# Altium PCB cy2018brush-driver.PcbDoc
Units mil, origin at the board's own origin, x right, y up, seen from the top; angles counter-clockwise.
Board outline 1651.83 x 1656.72 mil, 2 copper layers (Top Layer, Bottom Layer); 93 components, 101 nets, 336 pads, 49 vias.
Unrouted connection lines stored in the file: 25.
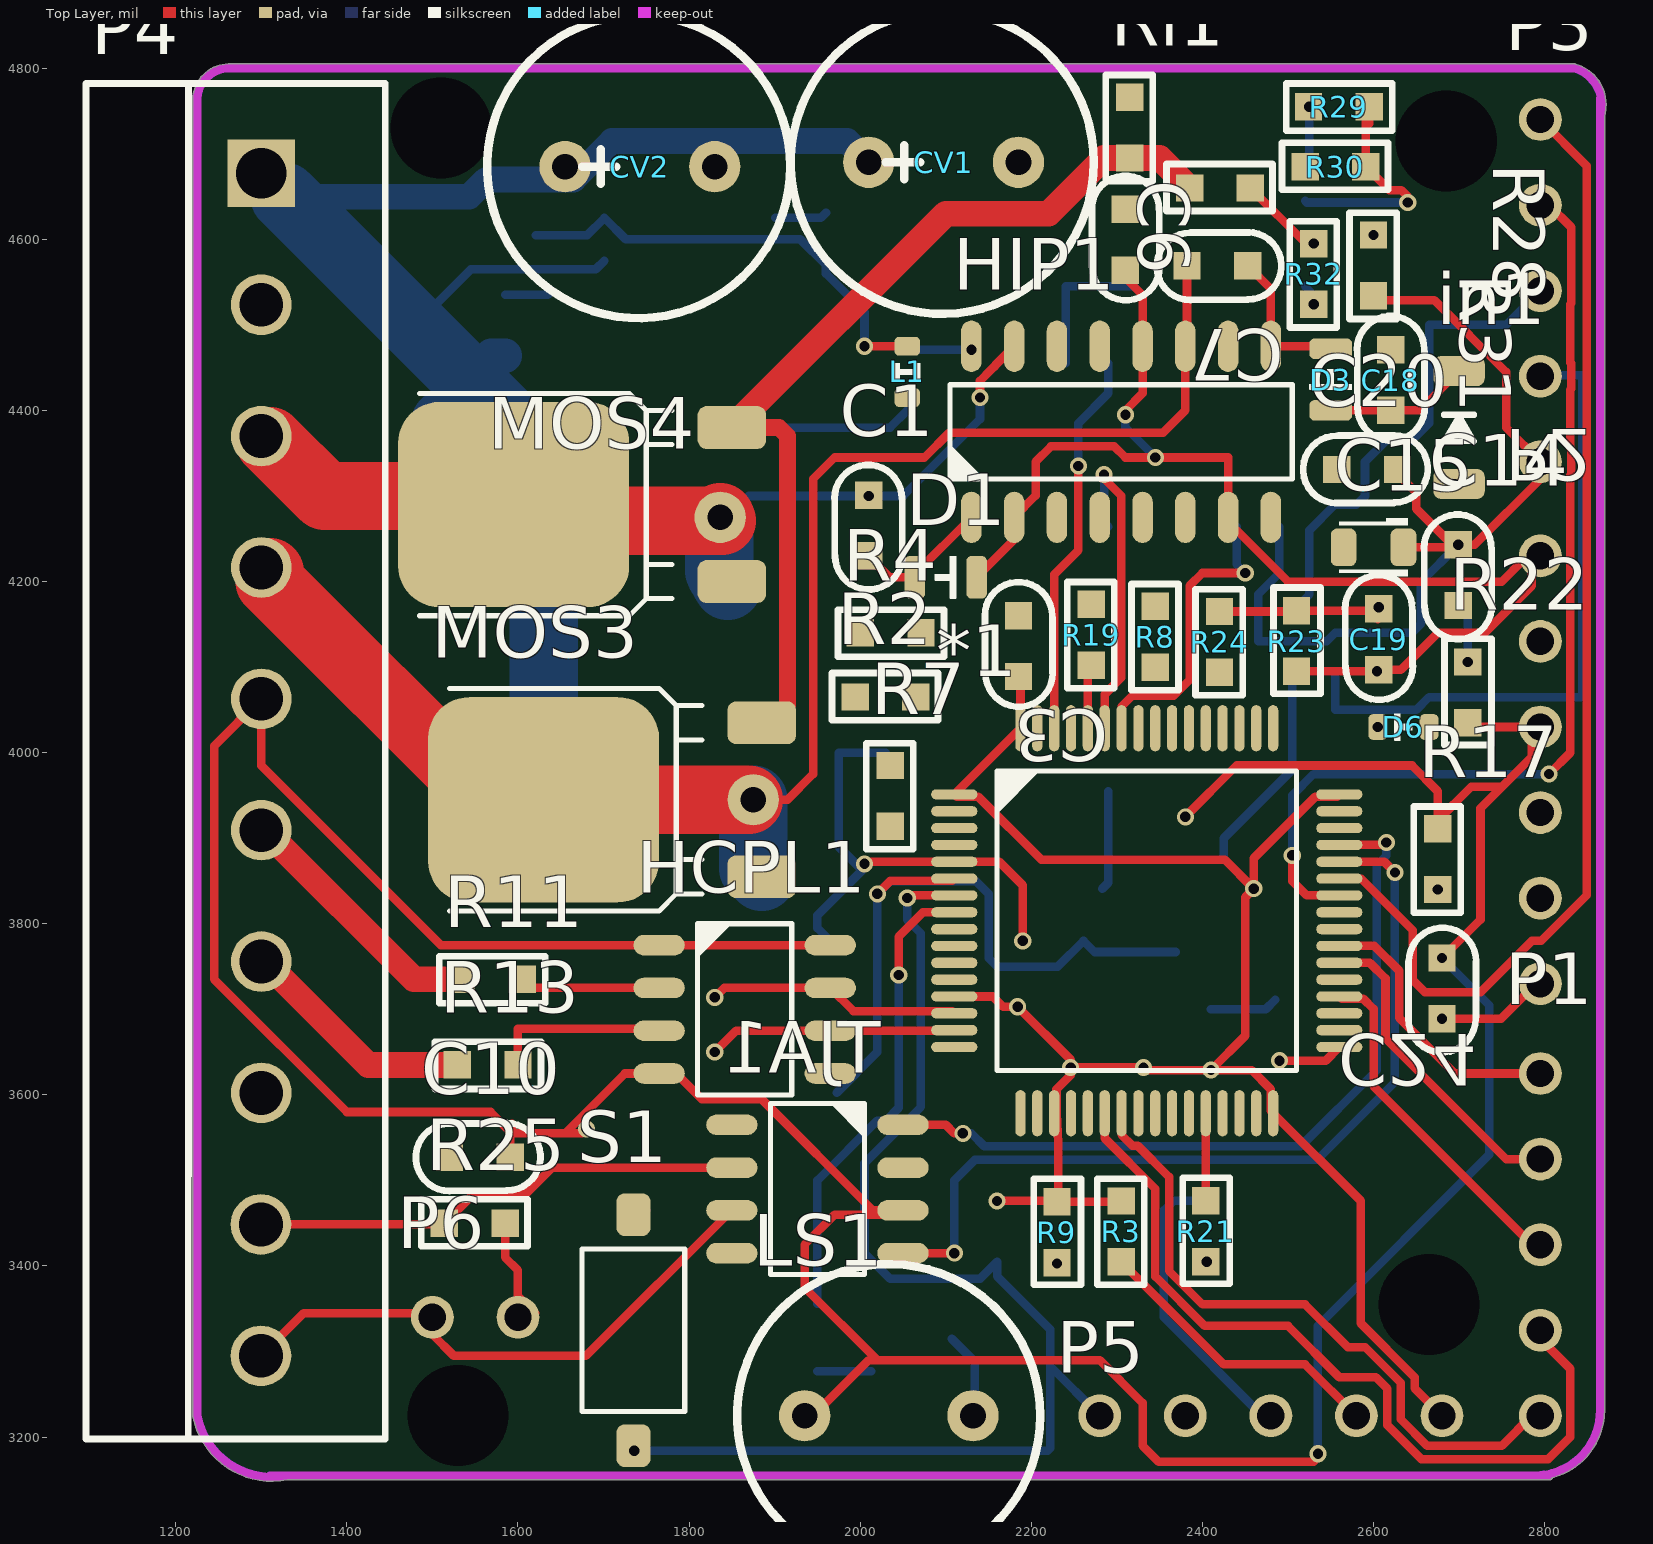
[diagram p0: Top Layer view]
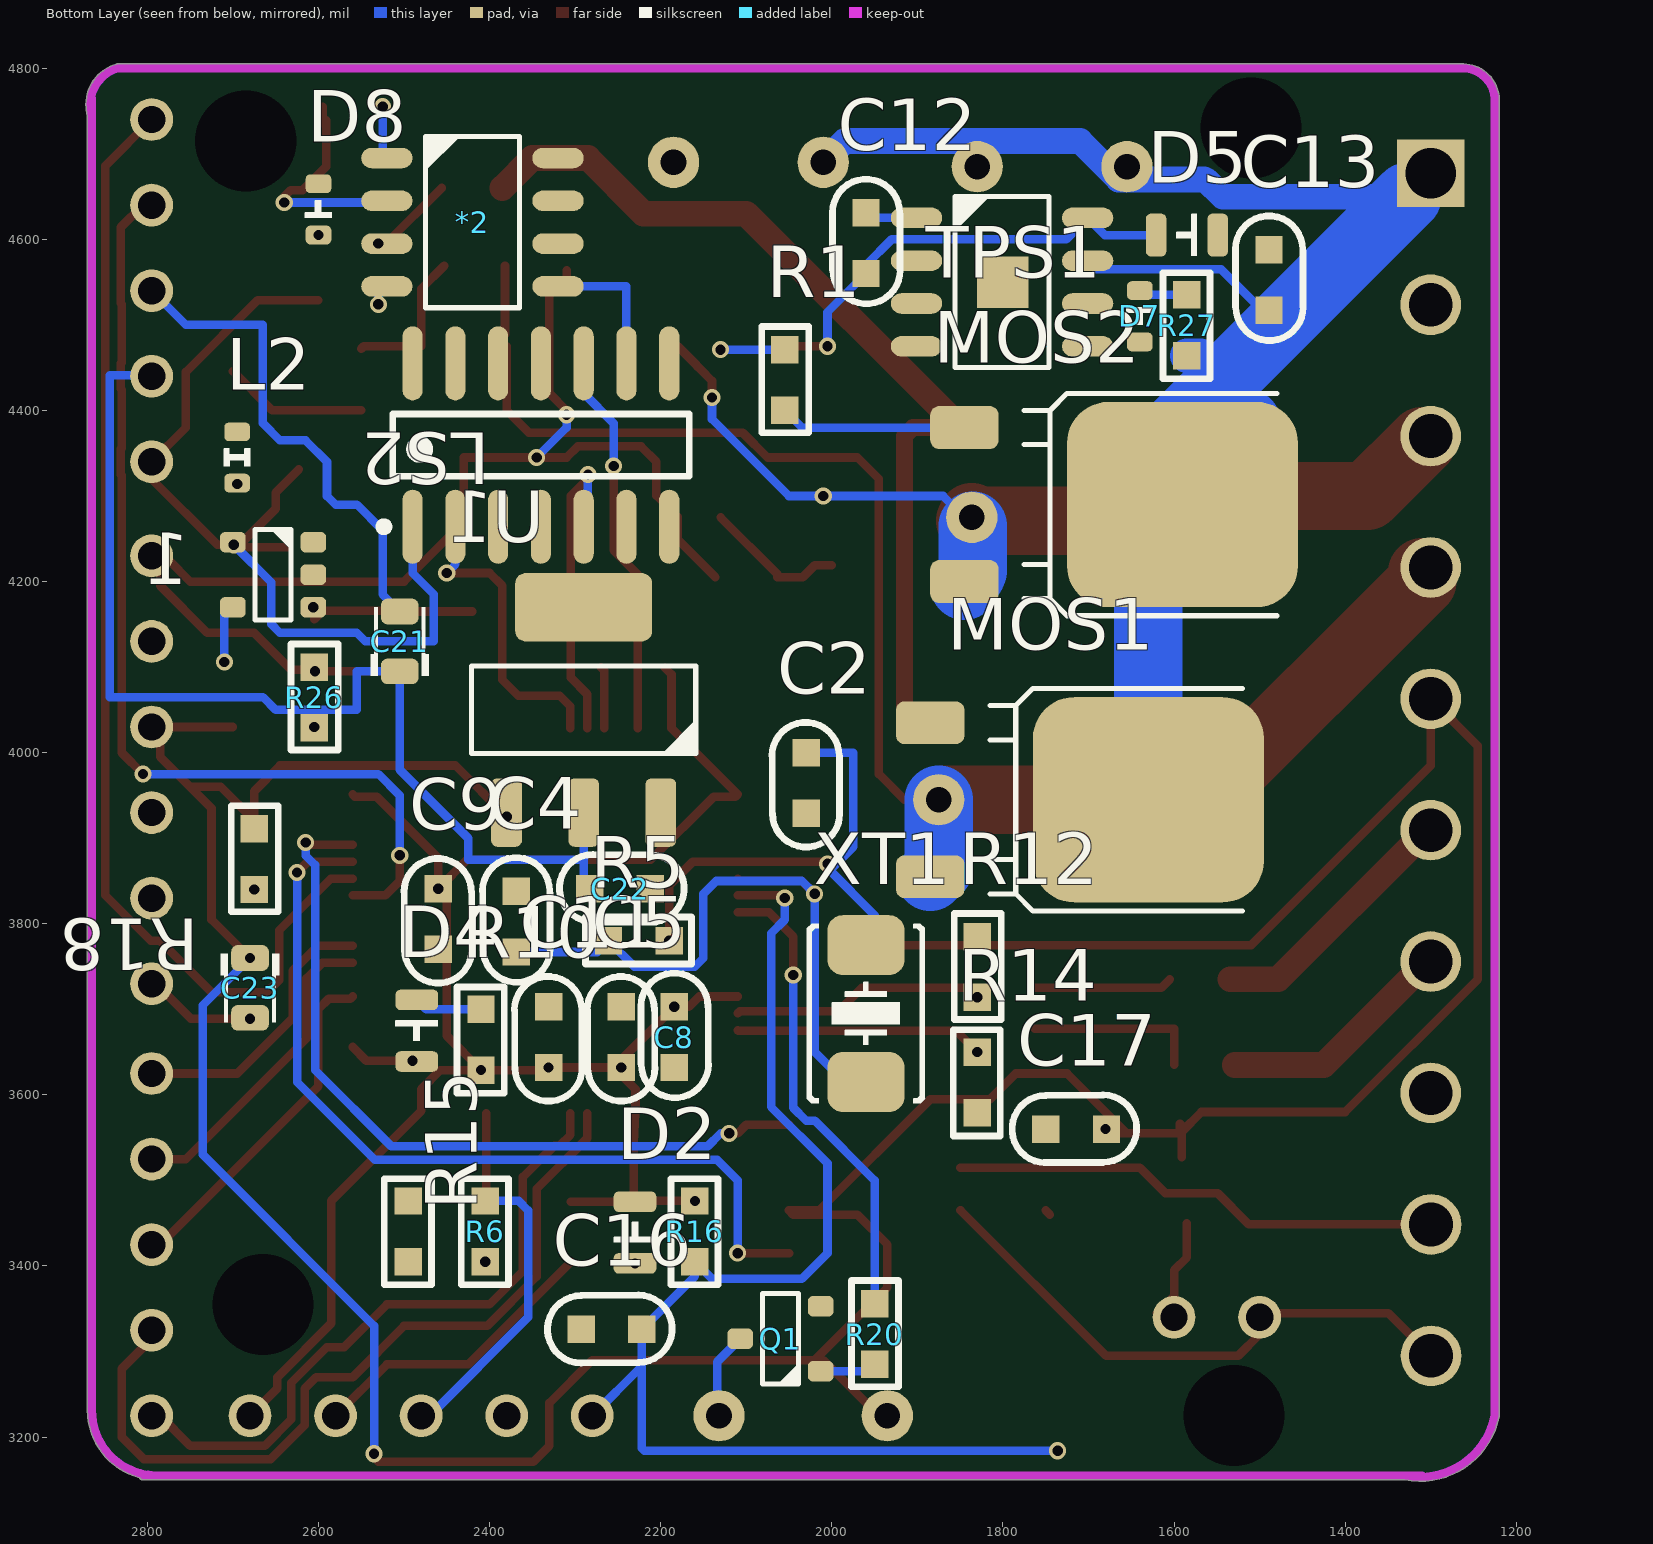
[diagram p1: Bottom Layer view, seen from below]
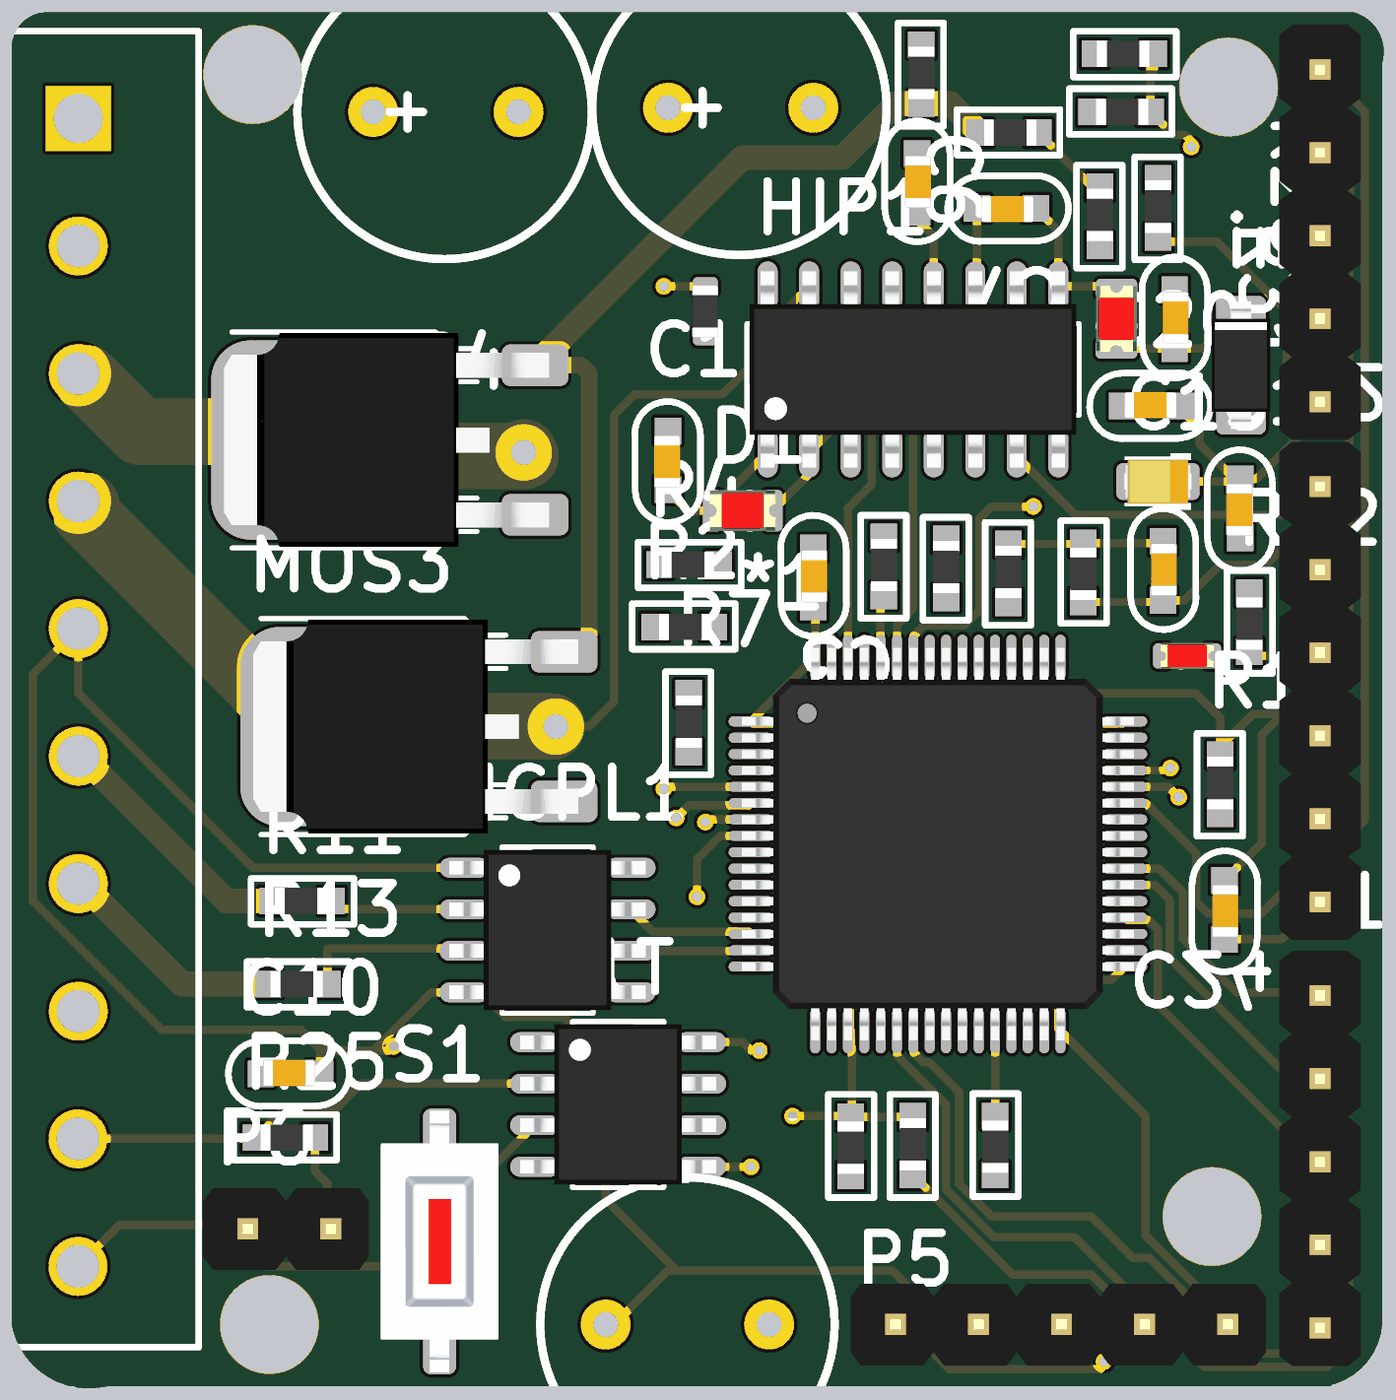
[diagram p2: 3D render of the assembled board from above, using the file's embedded part models]
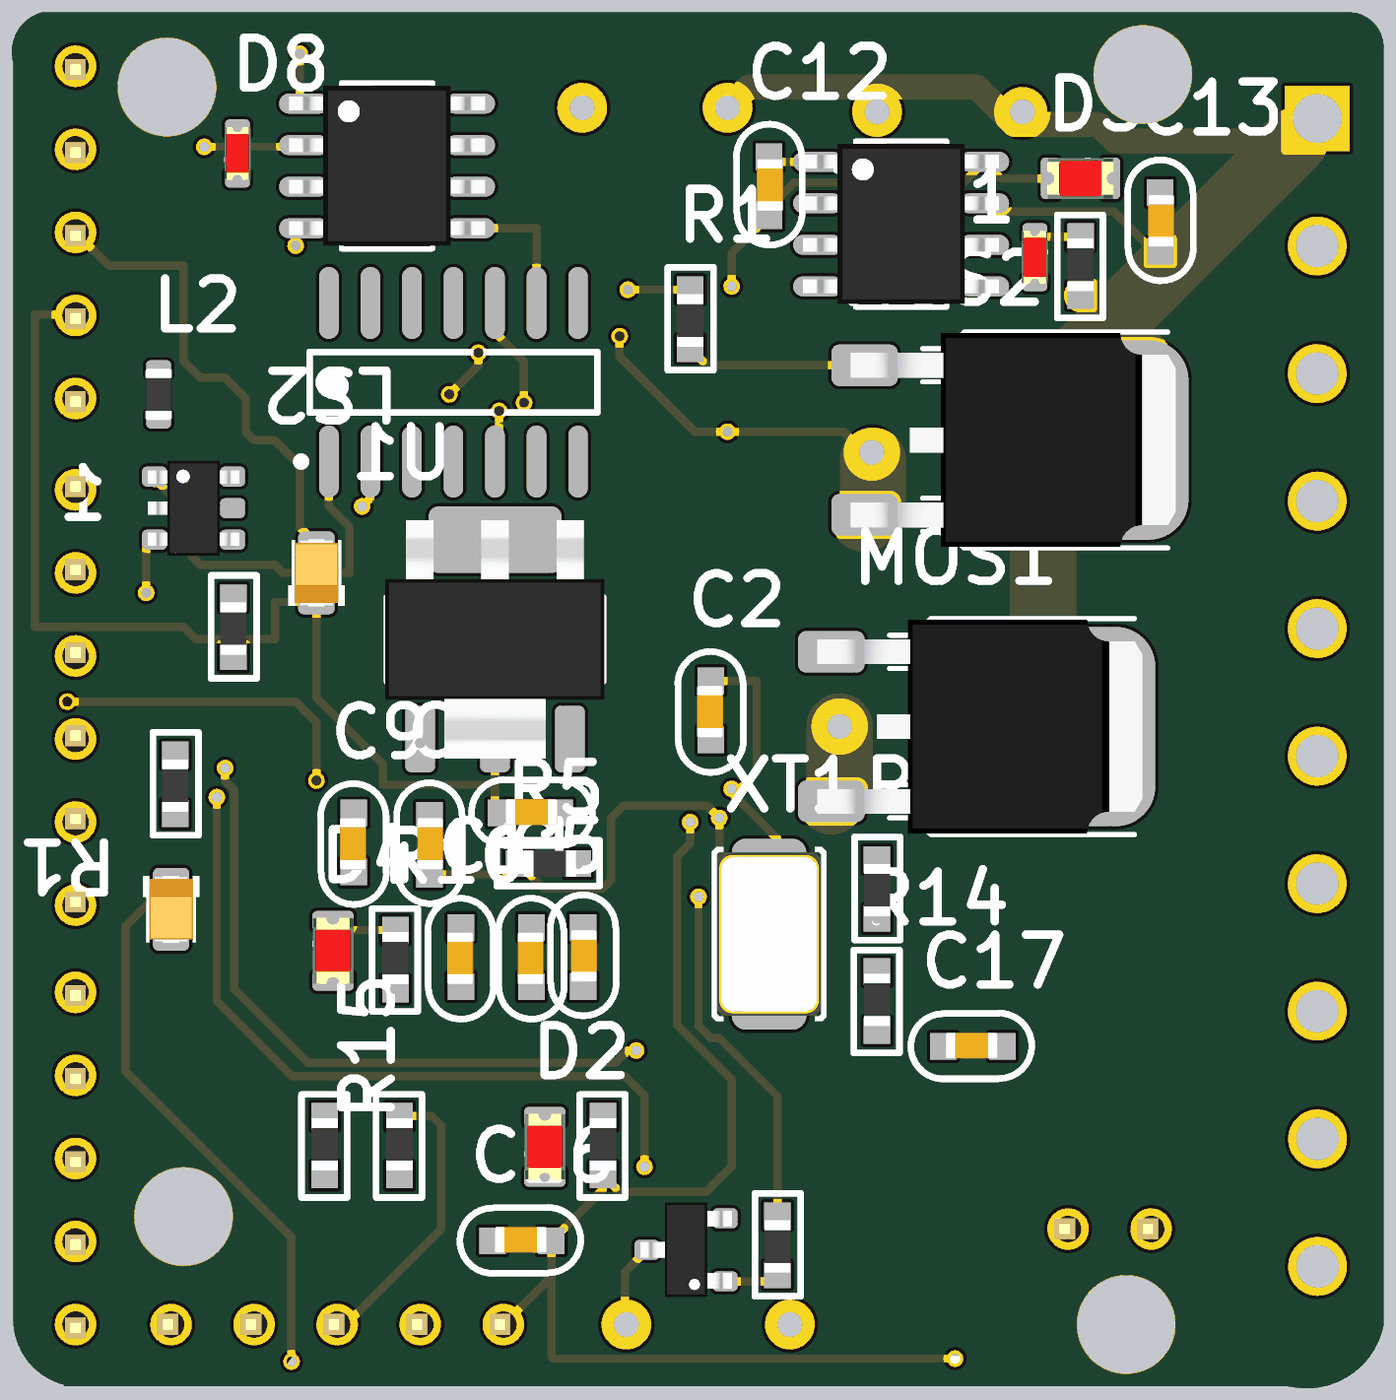
[diagram p3: 3D render of the assembled board from below, using the file's embedded part models]

## Layer stack, top to bottom
Top Solder: solder mask 0.4, Solder Resist, Dk 3.5
Top Layer: signal copper 1.4
Dielectric 1: dielectric 12.6, FR-4, Dk 4.8
Bottom Layer: signal copper 1.4
Bottom Solder: solder mask 0.4, Solder Resist, Dk 3.5

## Board outline
1330.49,3149.99 cw(c1312.5,3242.5) 1220.08,3224.02 cw(c1225,3225) 1219.98,3225 1219.98,4759.84 cw(c1262.5,4762.5) 1265.16,4805.02 2835,4805.02 cw(c2835,4800) 2836.42,4804.81 cw(c2822.5,4757.5) 2871.82,4757.5 cw(c2822.5,4757.5) 2870.01,4744.3 2870.01,3232.54 ccw(c2788.75,3231.25) 2870.01,3232.58 2870.01,3232.54 cw(c2788.75,3231.25) 2870.03,3231.25 cw(c2788.75,3231.25) 2809.43,3152.65 cw(c2805,3155) 2805,3149.99

## Design rules (kind name [scope] priority, off if disabled: settings)
Clearance [All] p1: gap=6 ignorepadtopadclearanceinfootprint=TRUE
PolygonConnect [All] p1: connectstyle=Direct reliefconductorwidth=10 reliefentries=4 polygonreliefangle="90 Angle" airgapwidth=10
RoutingVias [All] p1: holewidth=28 width=50 viastyle="Through Hole" minholewidth=28 minwidth=50 maxholewidth=28 maxwidth=50
SilkToSilkClearance [All] p1 off: silktosilkclearance=10
SolderMaskExpansion [All] p1: expansion=4
Width [All] p1: maxlimit=100 minlimit=10 preferedwidth=10 minimp=50.000000 maximp=50.000000 favimp=50.000000
29 further rules are at their usual default settings.

## Classes and differential pairs
component class Sheet1: 1 *1 C1 C2 C3 C4 C5 C6 C7 C8 C9 C10 C11 C12 C13 C14 C15 C16 C17 C18 C19 C20 C21 C22 C23 C24 CV1 CV2 D1 D2 D3 D4 D5 D6 D7 D8 HCPL1 HIP1 in1 L1 L2 LS1 LS2 MOS1 MOS2 MOS3 MOS4 P1 P2 P3 P4 P5 P6 Q1 R1 R2 R3 R4 R5 R6 R7 R8 R9 R10 R11 R12 R13 R14 R15 R16 R17 R18 R19 R20 R22 R23 R24 R25 R26 R27 R28 Ri1 S1 TJA1 TPS1 U1 XT1
component class 放大电路: *2 R29 R30 R31 R32

## Components (designator, comment, footprint, x,y, rotation, side; value= is the part's Value field where it differs from the comment)
1 "LM27313" SOT23-5 2653,4208 r0 bottom
*1 "STM32F103RC" LQFP_P0.5_64 2335,3803.58 r0 top
*2 "LM358ad" SOP_E150_8#1 2420,4620 r180 bottom
C1 "Cap_0603" CAP_0603#1 2011,4263 r90 top value=1uF
C2 "Cap_0603" CAP_0603#1 2029,3962 r90 bottom value=20pF
C3 "Cap_0603" CAP_0603#1 2184,4127 r270 top value=0.1uF
C4 "Cap_0603" CAP_0603#1 2370,3805 r270 bottom value=20pF
C5 "Cap_0603" CAP_0603#1 2245,3665 r90 bottom value=0.1uF
C6 "Cap_0603" CAP_0603#1 2309,4602 r270 top value=0.1uF
C7 "Cap_0603" CAP_0603#1 2420,4570 r180 top value=1uF
C8 "Cap_0603" CAP_0603#1 2185,3670 r270 bottom value=0.1uF
C9 "Cap_0603" CAP_0603#1 2459,3803 r90 bottom value=0.1uF
C10 "Cap_0603" CAP_0603#1 1553,3526 r0 top value=0.1uF
C11 "Cap_0603" CAP_0603#1 2330,3665 r90 bottom value=0.1uF
C12 "Cap_0603" CAP_0603#1 1961,4598 r270 bottom value=0.1uF
C13 "Cap_0603" CAP_0603#1 1490,4555 r270 bottom value=10uF
C14 "Cap_0603" CAP_0603#1 2700,4205 r90 top value=0.1uF
C15 "Cap_Tan_0805" CAP_TAN_P0805 2600,4240 r180 top value=220uF
C16 "Cap_0603" CAP_0603#1 2260,3325 r180 bottom value=01uF
C17 "Cap_0603" CAP_0603#1 1717,3559 r180 bottom value=0.1uF
C18 "Cap_0603" CAP_0603#1 2619,4438 r270 top value=4.7uF
C19 "Cap_0603" CAP_0603#1 2605,4135 r270 top value=220pF
C20 "Cap_0603" CAP_0603#1 2590,4330 r0 top value=2.2uF
C21 "Cap_Tan_0805" CAP_TAN_P0805 2505,4130 r90 bottom value=100uF
C22 "Cap_0603" CAP_0603#2 2245,3840 r0 bottom value=0.1uF
C23 "Cap_Tan_0805" CAP_TAN_P0805 2680,3725 r270 bottom value=100uF
C24 "Cap_0603" CAP_0603#2 2679,3722 r90 top value=0.1uF
CV1 "680uF" 电解电容器 2185,4690 r180 top value=*μF
CV2 "680uF" 电解电容器 1830,4685 r180 top value=*μF
D1 "Din5819" LED_0805_RED 2100,4205 r180 top
D2 "LED_0805" LED_0805_RED 2230,3439 r90 bottom
D3 "Din5819" LED_0805_RED 2550,4436 r90 top
D4 "LED_0805" LED_0805_RED 2485,3675 r270 bottom
D5 "Diode" LED_0805_RED 1585,4605 r0 bottom
D6 "LED_0603" LED_0603_RED 2635,4030 r0 top
D7 "LED_0603" LED_0603_RED 1640,4510 r270 bottom
D8 "LED_0603" LED_0603_RED 2600,4635 r90 bottom
HCPL1 "HCPL0630" SOP_E150_8#1 1865,3700 r0 top
HIP1 "hip4082" SOP_E150_16 2305,4375 r90 top
in1 "SchottkyDiode_SOD123" SOD-123 2700,4380 r90 top value=B?
L1 "Ind_0603" IND_0603 2055,4445 r270 top value=47H
L2 "Ind_0603" IND_0603 2695,4345 r270 bottom value=10uH
LS1 "Bell" Bell-5.6-0.6-9mm 2033.43,3225 r0 top
LS2 "74LS08" SOP14 2338,4357.53 r90 bottom
MOS1 "MOSFET_N" TO-252AA 1885,4035 r270 bottom value=NMOS?
MOS2 "MOSFET_N" TO-252AA 1845,4380 r270 bottom value=NMOS?
MOS3 "MOSFET_N" TO-252AA 1885,3855 r90 top value=NMOS?
MOS4 "MOSFET_N" TO-252AA 1850,4200 r90 top value=NMOS?
P1 "HDR1x5_2.54" HDR1X5_2.54_180 2795,3225 r180 top
P2 "HDR1x6_2.54" HDR1X6_2.54_180 2795,4230 r180 top
P3 "HDR1x5_2.54" HDR1X5_2.54_180 2795,4340 r180 top
P4 "Header 10" Green_10P 1300,4670 r270 top
P5 "HDR1x5_2.54" HDR1X5_2.54_180 2680,3225 r270 top
P6 "HDR1x2_2.54" HDR1X2_2.54_180 1600,3340 r270 top
Q1 "BJT_NPN" SOT23-3 2060,3315 r0 bottom
R1 "Res_0603" RES_0603 1973,4434 r270 bottom value=10K
R2 "Res_0603" RES_0603 2031,4147 r0 top value=10K
R3 "Res_0603" RES_0603 2223,3442 r90 top value=10K
R4 "Res_0603" RES_0603 2034,4058 r180 top value=10K
R5 "Res_0603" RES_0603 2224,3862 r180 bottom value=1M
R6 "Res_0603" RES_0603 2487,3442 r90 bottom value=10K
R7 "Res_0603" RES_0603 1953,3951 r90 top value=10K
R8 "Res_0603" RES_0603 2263,4137 r90 top value=10K
R9 "Res_0603" RES_0603 2312,3438 r270 top value=10K
R10 "Res_0603" RES_0603 2492,3666 r90 bottom value=10K
R11 "Res_0603" RES_0603 1568,3653 r180 top value=500
R12 "Res_0603" RES_0603 1748,3748 r270 bottom value=2k
R13 "Res_0603" RES_0603 1563,3553 r180 top value=500
R14 "Res_0603" RES_0603 1912,3616 r90 bottom value=2k
R15 "Res_0603" RES_0603 2577,3442 r90 bottom value=0
R16 "Res_0603" RES_0603 2242,3442 r90 bottom value=10K
R17 "Res_0603" RES_0603 2593,3877 r90 top value=10K
R18 "Res_0603" RES_0603 2593,3874 r270 bottom value=3.3K
R19 "Res_0603" RES_0603 2188,4139.37 r90 top value=10K
R20 "Res_0603" RES_0603 1868,3319 r270 bottom value=1K
R21 "Res_0603" RES_0603 2485.9,3439.1 r270 top value=10K
R22 "Res_0603" RES_0603 2792,4069 r270 top value=10K
R23 "Res_0603" RES_0603 2592,4129 r270 top value=10K
R24 "Res_0603" RES_0603 2338,4131 r90 top value=1K
R25 "Res_0603" RES_0603 1551,3532 r0 top value=120
R26 "Res_0603" RES_0603 2523,4063 r270 bottom value=10K
R27 "Res_0603" RES_0603 1667,4501 r90 bottom value=10K
R28 "Res_0603" RES_0603 2518,4571 r90 top value=10K
R29 "Res_0603" RES_0603 2558,4673 r180 top value=500K
R30 "Res_0603" RES_0603 2557,4767 r0 top value=10K
R31 "Res_0603" RES_0603 2422,4742 r0 top value=10K
R32 "Res_0603" RES_0603 2448,4561 r90 top value=500K
Ri1 "Res_0603" RES_0603 2233,4732 r90 top value=0.001
S1 "ButtonTACT_3x6x2.5_180" ButtonTACT_3x6x2.5_180 1735,3325 r90 top
TJA1 "TJA1050" SOP_E150_8#2 1950,3490 r180 top
TPS1 "TPS5430" SOP_E150_9 1800,4551 r180 bottom
U1 "tlv1117-3.3" SOT223-3 2290,4050 r0 bottom
XT1 "XTAL_32.768kHz" XT_5032_2 1960,3695 r90 bottom value=8M

## Footprints (in the part's own frame and the unit in brackets; to place one, negate y for a bottom-side part, rotate by r counter-clockwise, add the part's x,y. Pads: shape width x height; smd on the part's side, far side on the other; paste and mask are expansions set on the pad)
Bell-5.6-0.6-9mm [mil]
  round 60 hole 30: 1(-98.43,0) 2(98.43,0)
  silkscreen extent -177,-177 177,177
ButtonTACT_3x6x2.5_180 [mil]
  rrect50% 50x40 smd: 1(-135,0) 2(135,0)
  silkscreen extent -95,-60 95,60, body extent -157,-71 157,71, height 94
CAP_0603#1 [mil]
  rect 32x32 smd: 1(-33,1) 2(38,1)
  silkscreen extent -72,-38 73,41, body extent -30,-14 33,18, height 31
CAP_0603#2 [mil]
  rect 32x32 smd: 1(-33,-1) 2(38,-1)
  silkscreen extent -72,-41 73,38, body extent -30,-18 33,14, height 31
CAP_TAN_P0805 [mil]
  rrect50% 30x44 smd: 1(-35,0) 2(35,0)
  silkscreen extent -40,-34 40,34, body extent -40,-27 40,27, height 59
Green_10P [mm]
  rect 2x2 hole 1.5: 1(-0.18,0)
  round 1.8 hole 1.3: 2(3.72,0) 3(7.62,0) 4(11.52,0) 5(15.42,0) 6(19.32,0) 7(23.22,0) 8(27.12,0) 9(31.025,-0.01) 10(34.925,-0.01)
  silkscreen extent -2.85,-5.21 37.39,3.68
HDR1X2_2.54_180 [mil]
  round 50 hole 32: 1(0,0) 2(0,-100)
  body extent -49,-150 49,50, height 323
HDR1X5_2.54_180 [mil]
  round 50 hole 32: 1(0,0) 2(0,-100) 3(0,-200) 4(0,-300) 5(0,-400)
  body extent -49,-450 49,50, height 323
HDR1X6_2.54_180 [mil]
  round 50 hole 32: 1(0,0) 2(0,100) 3(0,200) 4(0,300) 5(0,400) 6(0,500)
  body extent -49,-58 49,542, height 323
IND_0603 [mil]
  rrect50% 22x30 smd: 1(-30,0) 2(30,0)
  silkscreen extent -10,-15 10,15, body extent -31,-16 31,16, height 31
LED_0603_RED [mil]
  rrect50% 22x30 smd: 1(-30,0) 2(30,0)
  silkscreen extent -10,-16 10,16, body extent -32,-16 32,16, height 24
LED_0805_RED [mil]
  rrect50% 24x50 smd: 1(-36,0) 2(36,0)
  silkscreen extent -12,-24 12,24, body extent -40,-25 40,25, height 43
LQFP_P0.5_64 [mil]
  oval 54x12 smd: 1(-225,147.64) 2(-225,127.95) 3(-225,108.27) 4(-225,88.58) 5(-225,68.9) 6(-225,49.21) 7(-225,29.53) 8(-225,9.84) 9(-225,-9.84) 10(-225,-29.53) 11(-225,-49.21) 12(-225,-68.9) 13(-225,-88.58) 14(-225,-108.27) 15(-225,-127.95) 16(-225,-147.64) 33(225,-147.64) 34(225,-127.95) 35(225,-108.27) 36(225,-88.58) 37(225,-68.9) 38(225,-49.21) 39(225,-29.53) 40(225,-9.84) 41(225,9.84) 42(225,29.53) 43(225,49.21) 44(225,68.9) 45(225,88.58) 46(225,108.27) 47(225,127.95) 48(225,147.64)
  oval 12x54 smd: 17(-147.64,-225) 18(-127.95,-225) 19(-108.27,-225) 20(-88.58,-225) 21(-68.9,-225) 22(-49.21,-225) 23(-29.53,-225) 24(-9.84,-225) 25(9.84,-225) 26(29.53,-225) 27(49.21,-225) 28(68.9,-225) 29(88.58,-225) 30(108.27,-225) 31(127.95,-225) 32(147.64,-225) 49(147.64,225) 50(127.95,225) 51(108.27,225) 52(88.58,225) 53(68.9,225) 54(49.21,225) 55(29.53,225) 56(9.84,225) 57(-9.84,225) 58(-29.53,225) 59(-49.21,225) 60(-68.9,225) 61(-88.58,225) 62(-108.27,225) 63(-127.95,225) 64(-147.64,225)
  silkscreen extent -175,-175 175,175, body extent -236,-236 236,236, height 59
RES_0603 [mil]
  rect 32x32 smd: 1(-37,-82) 2(34,-82)
  silkscreen extent -64,-109 60,-54, body extent -31,-98 31,-66, height 18
SOD-123 [mil]
  rrect50% 35x60 smd: 1(-66,0) 2(66,0)
  silkscreen extent -16,-18 16,18, body extent -77,-35 77,35, height 46
SOP14 [mm]
  oval 2.2x0.6 smd: 1(-2.374,3.861) 2(-2.374,2.591) 3(-2.374,1.321) 4(-2.374,0.051) 5(-2.374,-1.219) 6(-2.374,-2.489) 7(-2.374,-3.759) 8(2.476,-3.759) 9(2.476,-2.489) 10(2.476,-1.219) 11(2.476,0.051) 12(2.476,1.321) 13(2.476,2.591) 14(2.476,3.861)
  silkscreen extent -2.5,-4.35 0.98,4.84, body extent -1.95,-4.35 2.05,4.45, height 1.7
SOP_E150_8#1 [mil]
  oval 60x24 smd: 1(-100,75) 2(-100,25) 3(-100,-25) 4(-100,-75) 5(100,-75) 6(100,-25) 7(100,25) 8(100,75)
  silkscreen extent -55,-100 55,100, body extent -118,-96 118,96, height 69
SOP_E150_8#2 [mil]
  oval 60x24 smd: 1(-100,-75) 2(-100,-25) 3(-100,25) 4(-100,75) 5(100,75) 6(100,25) 7(100,-25) 8(100,-75)
  silkscreen extent -55,-100 55,100, body extent -118,-96 118,96, height 69
SOP_E150_9 [mil]
  oval 60x24 smd: 1(-101,74) 2(-101,24) 3(-101,-26) 4(-101,-76) 5(99,-76) 6(99,-26) 7(99,24) 8(99,74)
  rect 60x60 smd: 9(0,-1)
  silkscreen extent -56,-101 54,99, body extent -119,-97 117,95, height 69
SOP_E150_16 [mil]
  oval 60x24 smd: 1(-100,175) 2(-100,125) 3(-100,75) 4(-100,25) 5(-100,-25) 6(-100,-75) 7(-100,-125) 8(-100,-175) 9(100,-175) 10(100,-125) 11(100,-75) 12(100,-25) 13(100,25) 14(100,75) 15(100,125) 16(100,175)
  silkscreen extent -55,-200 55,200, body extent -118,-197 118,197, height 69
SOT23-3 [mil]
  rrect50% 30x24 smd: 1(-47,38) 2(-47,-38) 3(47,0)
  silkscreen extent -21,-53 21,53, body extent -55,-57 55,57, height 51
SOT23-5 [mil]
  rrect50% 30x24 smd: 1(-47,-38) 2(-47,0) 3(-47,38) 4(47,38) 5(47,-38)
  silkscreen extent -21,-53 21,53, body extent -55,-57 55,57, height 57
SOT223-3 [mil]
  rrect40% 36x80 smd: 1(-90.16,120) 2(0,120) 3(90.16,120)
  rrect30% 160x80 smd: 4(0,-120)
  silkscreen extent -131,-51 131,51, body extent -132,-144 132,144, height 71
TO-252AA [mil]
  rrect40% 50x80 smd: 1(0,0) 3(180,0)
  rrect40% 240x270 smd: 4(90,255)
  silkscreen extent -40,70 220,365, body extent -39,-17 219,374, height 91
XT_5032_2 [mil]
  rrect50% 70x90 smd: 1(-80,0) 2(80,0)
  silkscreen extent -104,-68 104,68, body extent -98,-63 98,63, height 39
电解电容器 [mil]
  round 60 hole 30: 1(175,0) 2(0,0)
  silkscreen extent -88,-177 266,177

## Part data
*1: "MCU"
C1 C2 C3 C4 C5 C6 C7 C8 C9 C10 C11 C12 C13 C14 C15 C16 C17 C18 C19 C20 C21 C22 C23 C24: "Capacitor"
CV1 CV2: library part CAP-ELE, "电解电容", LatestRevisionDate=17-Jul-2002, LatestRevisionNote="Re-released for DXP Platform.", PackageDescription="Polarized Capacitor (Radial); 2 Leads", PackageReference=RB7.6-15, Published=8-Jun-2000, Publisher="Altium Limited"
D1 D3: library part Diode, "Diode"
D2 D4 D6 D7 D8: "LED"
in1: "Diode"
L1 L2: "Inductor"
LS1: "Electrical Bell", LatestRevisionDate=17-Jul-2002, LatestRevisionNote="Re-released for DXP Platform.", PackageReference=PIN2, Published=24-Mar-1999, Publisher="Altium Limited"
MOS1 MOS2 MOS3 MOS4: "MOSFET"
P1 P2 P3 P5 P6: "Header"
P4: "Header, 10-Pin", LatestRevisionDate=17-Jul-2002, LatestRevisionNote="Re-released for DXP Platform.", Publisher="Altium Limited"
Q1: "Transistor"
R1 R2 R3 R4 R5 R6 R7 R8 R9 R10 R11 R12 R13 R14 R15 R16 R17 R18 R19 R20 R21 R22 R23 R24 R25 R26 R27 R28 R29 R30 R31 R32 Ri1: "Resistor"
S1: "Button"
TJA1: "CAN总线收发器"
U1: library part LM1117IMP-5.0, "800mA Low-Dropout Linear Regulator", DigiKeyPartNumber=LM1117IMP-5.0CT-ND, Manufacturer="National Semiconductor", PackageTopMarking=XYTT*N06B, PowerWise=N, Code_IPC=SOT223-4, Code_JEDEC=TO-261-AA, ComponentLink1Description="LM1117 Datasheet", ComponentLink1URL=http://www.national.com/ds/LM/LM1117.pdf, ComponentLink2Description="LM1117 Web Page", ComponentLink2URL=http://www.national.com/pf/LM/LM1117.html, ComponentLink3Description="MP04A Package Page", ComponentLink3URL=http://www.national.com/packaging/folders/mp04a.html, CompType="LDO IC", DatasheetVersion=Apr-2006, PackageDescription="Molded SOT-223, 6.50 x 3.56 x 1.6mm Body, 4 Lead, 2.3mm Pitch", PackageReference=MP04A, PackageVersion="revB, Apr-2003", PartNumber=LM1117IMP-5.0, PinCount=4, Published=4-Dec-2008, Publisher="Altium Limited", RoHS=O
XT1: library part XTAL_32.768k, "Crystal Oscillator"

## Free pads (board coordinates)
  round 30 hole 118.11: 1(1530,3225) 2(2665,3355) 3(2685,4715) 4(1510,4730)
  round 60 hole 30: 6(1875,3945) 7(1836.25,4275)

## Via types
v1: diameter 20, hole 12, Top Layer to Bottom Layer, 49 vias

## Nets (pads, with @x,y where several pads share a name; then routed paths per layer and width w, separated by ;. In a path a pad name is that pad's centre, name@x,y a point inside that pad or via, vN(x,y) a via of type N, cw(c..) or ccw(c..) an arc to the next point about the centre after c; other vN are vias at no path point)
3.3V: C21.1 C22.2 P3.2 R12.1 R14.1 U1.2 | length 1320.7
  Bottom Layer w10: C22.2 2290,3848 2290,3875 ; U1.2@2290,3955 U1.2 2290,3875 ; P3.2 2796,4441 2844,4441 2844,4065 2665,4065 2650,4050 2555,4050 2555,4095 C21.1 2505,3980 2425,3900 2425,3875 2290,3875
3V3: *1.1 *1.13 *1.19 *1.32 *1.48 *1.64 C3.2 C5.1 C8.1 C9.2 C11.1 P5.1 R3.2 R9.1 R10.1 R16.2 | length 2192.1
  Top Layer w10: *1.13 2155,3715 2167,3703 v1(2184,3703) 2246,3641 v1(2246,3632) ; v1(2160,3476) R9.1@2231.73,3476 ; C3.2@2195,4099 2187.36,4091.36 *1.64 *1.1 2112.68,3948.54 2138.04,3948.54 2211.58,3875 2426,3875 v1(2460,3841) ; R9.1@2220,3475 R9.1 R9.1@2231.73,3475 ; R9.1@2231.73,3471.73 R9.1@2231.73,3475 ; R3.2@2305,3475 R9.1@2235,3475 ; *1.48 2557.31,3948.54 2531.96,3948.54 2460,3876.58 v1(2460,3841) ; P5.1 2648,3257 2648,3270 2585,3333 2585,3476.22 *1.32 2479.95,3581.27 2479.95,3606.62 2457.58,3629 v1(2410,3629) ; R9.1@2231.73,3475 R9.1@2231.73,3476 ; R9.1@2231.73,3475 R9.1@2235,3475 ; R9.1@2231.73,3476 2231.73,3543.58 2229.57,3578.76 2229.42,3581.27 2229.42,3606.62 2246,3623.21 v1(2246,3632) ; R9.1@2231.73,3476 2236,3476 R9.1@2235,3475 ; v1(2246,3632) v1(2331,3632) 2334,3629 v1(2410,3629) ; v1(2410,3629) 2450,3669 2450,3831 v1(2460,3841)
5V: 1.5 *2.5 C10.2 C14.2 C15.1 C17.2 C20.2 C23.1 C24.2 HCPL1.1 HCPL1.4 HCPL1.8 L1.2 L2.1 LS1.1 LS2.1 LS2.4 LS2.9 LS2.14 P2.3 P3.1 P4.5 R17.2 R22.2 R28.1 TJA1.3 U1.3 | length 6054
  Top Layer w10: C10.2 1591,3557 ; v1(1680,3560) 1675,3555 1655,3555 ; LS1.1 1945,3225 2010,3290 2280,3290 2330,3240 2330,3190 2349,3171 2530,3171 2535,3176 v1(2535,3180.5) ; HCPL1.8 HCPL1.1 1510,3775 1300,3985 P4.5 1245,4007.91 1245,3735 1400,3580 1568,3580 1591,3557 ; 2020,3290 1935,3375 1935,3425 1970,3460 2045,3460 TJA1.3 2015,3465 1885,3595 1815,3595 1785,3625 HCPL1.4 1725,3625 1655,3555 ; v1(2380,3925) 2440,3985 2645,3985 2675,3955 2675,3921 2714,3960 2749,3960 ; R28.1@2600,4529 2671,4529 2755,4445 2755,4380 P3.1 2795,4320 2718,4243 v1(2699,4243) 2692,4243 2650,4285 2650,4304 C20.2@2623,4331 ; C15.1 C14.2@2695,4240 ; v1(2680,3760) 2725,3805 2725,3935 2785,3995 2785,4030 R22.2@2700,4030 ; 1591,3557 1593,3555 ; 1591,3557 1591,3564 1593,3566 1593,3555 ; 1593,3555 1655,3555
  Bottom Layer w10: LS2.9 2240,4545 *2.5 ; LS2.1 2490,4210 2465,4185 2465,4130 2545,4130 2555,4140 2645,4140 2655,4150 2655,4199 v1(2699,4243) ; v1(2535,3180.5) 2535,3330 2735,3530 2735,3705 v1(2680,3760)
12V: C6.2 C18.2 C19.2 D1.1 D3.1 HIP1.2 HIP1.7 HIP1.12 in1.2 P2.1 R23.2 R26.1 | length 1636.3
  Top Layer w10: D1.1 2180,4249 HIP1.2 2180,4275.53 2205,4300.53 2205,4340 2223,4358 2297,4358 2310,4345 2430,4345 HIP1.7 2430,4270 2500,4200 2750,4200 2775,4225 2785,4225 2785,4195 2730,4140 2675,4140 2632,4097 C19.2 v1(2604,4095) R23.2 ; v1(2310,4395) 2310,4400 2330,4420 HIP1.12 2330,4535 2310,4555 C6.2 ; D3.1 C18.2 2654,4400 in1.2
  Bottom Layer w10: v1(2310,4395) 2310,4380 v1(2345,4345)
BOOT0: *1.60 R19.1 | length 73
  Top Layer w10: *1.60 2266.1,4096.1 R19.1@2270,4100
BOOT1: *1.28 R21.1 | length 104
  Top Layer w10: *1.28 R21.1 R21.1@2405,3475
CAN_H: P4.9 R25.1 TJA1.7 | length 577.9
  Top Layer w10: P4.9 1512.56,3448.56 R25.1 1549,3485 1610,3485 1640,3515 TJA1.7
CAN_L: P4.10 P6.2 TJA1.6 | length 676.9
  Top Layer w10: P4.10 1349.57,3345 1500,3345 P6.2 1500,3320 1524.94,3295.05 1559.02,3295.05 1559.07,3295 1679.47,3295 1849.47,3465 TJA1.6
CAN_RX: *1.44 TJA1.4 | length 1022.8
  Top Layer w10: TJA1.4 v1(2110,3415) ; *1.44 2612.52,3872.48 v1(2625,3860)
  Bottom Layer w10: v1(2110,3415) 2110,3500 2134,3524 2534,3524 2625,3615 v1(2625,3860)
CAN_TX: *1.45 TJA1.1 | length 928
  Top Layer w10: TJA1.1 2100,3565 2110,3555 v1(2120,3555) ; *1.45 2612.17,3892.17 v1(2615,3895)
  Bottom Layer w10: v1(2120,3555) 2130,3555 2145,3540 2515,3540 2604,3629 2604,3868.7 2615,3879.7 v1(2615,3895)
DIS: *1.62 LS2.10 | length 452.6
  Top Layer w10: *1.62 2226.73,4208.27 2255,4236.54 v1(2255,4335)
  Bottom Layer w10: v1(2255,4335) 2255,4385 2290,4420 LS2.10
DIS2: *1.36 P1.3 | length 398.1
  Top Layer w10: *1.36 2562.68,3712.31 2588.04,3712.31 2600,3700.36 2600,3610 P1.3@2785,3425
DISIN: HIP1.8 LS2.8
GND: *1.12 *1.18 *1.31 *1.47 *1.63 C2.1 C3.1 C4.1 C5.2 C8.2 C9.1 C11.2 C16.1 C17.1 C21.2 C22.1 D2.2 HCPL1.5 P3.3 P5.4 R6.1 R15.2 R19.2 R21.2 S1.2 TJA1.2 TJA1.8 U1.1 | length 587.1
  Top Layer w10: S1.2@1745,3460 S1.2@1750,3465
  Bottom Layer w10: C21.2 2525,4185 2525,4260 2555,4290 2580,4290 2590,4300 2590,4340 2615,4365 2645,4365 2665,4385 2665,4500 2755,4500 P3.3
  other v1: 2405,3405
LED1: *1.30
LED2: *1.29
MOT+: C1.2 HIP1.15 MOS2.3 MOS4.4 P4.3 pad.7 | length 1102.7
  Top Layer w10: v1(2140,4415) 2140,4434.47 2153,4447.47 2157.76,4452.24 2157.76,4452.76 HIP1.15
  Top Layer w80: P4.3@1310,4364.17 1374.17,4300 1620,4300 1649,4271 1838.5,4271 pad.7
  Bottom Layer w10: pad.7@1835,4265 1870,4300 v1(2010,4300) 2050,4300 2140,4390 v1(2140,4415)
  Bottom Layer w80: pad.7@1835,4265 1835,4212.62 1842.85,4198.78 MOS2.3@1845,4195
MOT-: C7.2 HIP1.11 MOS1.3 MOS3.4 P4.4 pad.6 | length 1826
  Top Layer w10: pad.6 1915,3945 1945,3975 1945,4320 1970,4345 2075,4345 2104,4374 2354,4374 2380,4400 HIP1.11 HIP1.11@2385,4475 ; HIP1.11@2382,4489 C7.2
  Top Layer w80: P4.4@1310,4210.63 1310,4200 1565,3945 MOS3.4 pad.6@1870,3945
  Bottom Layer w80: pad.6 1875,3865 MOS1.3
Net1_1: 1.1 in1.1 L2.2
  other v1: 2695,4314
Net1_3: 1.3 C19.1 R23.1 R24.2 | length 189.6
  Top Layer w10: R24.2 2509,4165 R23.1 2595,4166 C19.1@2605,4156
  other v1: 2606,4170
Net1_4: 1.4 R22.1 | length 68.1
  Bottom Layer w10: 1.4 2710,4160 v1(2710,4106)
Net*2_1: *2.1 R29.2 | length 62.1
  Bottom Layer w10: *2.1 2525,4700 v1(2525,4755)
Net*2_2: *2.2 R29.1 R30.2 | length 271
  Top Layer w10: R29.1 2595,4735 2591,4739 R30.2 2618.65,4657.35 2632.65,4657.35 2640,4650 v1(2640,4643)
  Bottom Layer w10: *2.2 2522,4643 v1(2640,4643)
Net*2_3: *2.3 R31.2 R32.2 | length 100.9
  Top Layer w10: R31.2 2521,4595 v1(2530,4595)
Net*2_4: *2.4 R32.1 | length 25.1
  Bottom Layer w10: *2.4 2530,4535 v1(2530,4524)
NetC1_1: C1.1 D1.2 HIP1.1 | length 167.1
  Top Layer w10: C1.1@2000,4219 2020,4219 2034,4205 D1.2 2064,4209 HIP1.1
NetC7_1: C7.1 D3.2 HIP1.9 | length 176.4
  Top Layer w10: C7.1 2480,4542 HIP1.9 2547,4475 D3.2
NetC12_1: C12.1 TPS1.1 | length 61.5
  Bottom Layer w10: TPS1.1 1954,4625 C12.1
NetC12_2: C12.2 D5.2 L1.1 TPS1.8 | length 533.7
  Top Layer w10: v1(2005,4475) L1.1
  Bottom Layer w10: D5.2 1681,4605 TPS1.8 1726,4600 1930,4600 1960,4570 C12.2 2005,4515 v1(2005,4475)
NetD2_1: D2.1 R9.2
  other v1: 2230,3403
NetD4_1: D4.1 R10.2 | length 79.6
  Bottom Layer w10: R10.2 2474,3700 D4.1
NetD6_1: D6.1 R26.2
  other v1: 2605,4030
NetD7_1: D7.1 R27.2 | length 57.1
  Bottom Layer w10: R27.2 1635,4535 D7.1
NetD8_1: D8.1 R28.2
  other v1: 2600,4605
NetHCPL1_2: HCPL1.2 R11.1 | length 164.1
  Top Layer w10: R11.1 1615,3725 HCPL1.2
NetHCPL1_3: HCPL1.3 R13.1 | length 205
  Top Layer w10: R13.1 1600,3677.5 HCPL1.3@1762.5,3677.5
NetHIP1_5: HIP1.5 R8.2
NetHIP1_10: HIP1.10 R2.2
NetHIP1_13: HIP1.13 R7.2
NetHIP1_14: HIP1.14 R4.1
NetHIP1_16: HIP1.16 R1.1 | length 75
  Bottom Layer w10: R1.1 v1(2130,4471)
NetLS1_2: LS1.2 Q1.3 | length 96.1
  Bottom Layer w10: Q1.3 2133.85,3288.15 LS1.2@2133.85,3230
NetMOS1_1: MOS1.1 R2.1
NetMOS2_1: MOS2.1 R1.2 | length 208.3
  Bottom Layer w10: MOS2.1@1855,4380 2035,4380 R1.2
NetMOS3_1: MOS3.1 R7.1
NetMOS4_1: MOS4.1 R4.2
NetP6_1: P6.1 R25.2 | length 119.5
  Top Layer w10: R25.2 1585,3410 1600,3395 1600,3365 P6.1@1620,3345
NetQ1_1: Q1.1 R20.2 | length 63
  Bottom Layer w10: R20.2@1950,3277 Q1.1
NetR17_1: R17.1 R18.2 TPS1.4
  other v1: 2675,3840
NRST: *1.7 C16.2 P5.5 R16.1 S1.1 | length 1493.9
  Top Layer w10: v1(2055,3830) 2058.11,3833.11 *1.7
  Bottom Layer w10: v1(1736,3184) 2219,3184 2222,3187 2222,3283 ; v1(2055,3830) 2055,3804.7 2071,3788.7 2071,3586 2005,3520 2005,3415 2035,3385 2140,3385 R16.1 2160,3388 C16.2 2222,3283 ; P5.5 2222,3283
OLEDRESET: *1.24
OSC32_IN: *1.3
OSC32_OUT: *1.4
OSCIN: *1.5 C2.2 R5.2 XT1.2 | length 593.8
  Top Layer w10: v1(2005,3870) 2007.48,3872.48 *1.5 2162.52,3872.48 2190,3845 v1(2190,3780)
  Bottom Layer w10: XT1.2@1970,3775 1950,3795 1950,3810 2002.5,3862.5 1975,3890 1975,4000 C2.2 ; v1@1995,3870 v1(2005,3870)
OSCOUT: *1.6 C4.2 R5.1 XT1.1 | length 807.9
  Top Layer w10: v1(2020,3835) 2035.11,3850.11 2107.32,3850.11 *1.6
  Bottom Layer w10: XT1.1@1972.5,3602.5 2020,3650 v1(2020,3835) 2035,3850 2135,3850 2150,3835 2150,3760 2160,3750 2231,3750 R5.1 2274,3767 C4.2
PA2: *1.16
PA3: *1.17
PA4: *1.20
PA5: *1.21
PA8: *1.41
PA13: *1.46 P5.2 R3.1 | length 349.6
  Top Layer w10: R3.1 2425,3285 2520,3285 P5.2
PA14: *1.49 P5.3 R6.2 | length 352.2
  Bottom Layer w10: R6.2 2366,3476 2355,3465 2355,3340 2470,3225 P5.3
PA15: *1.50
PB0: *1.26
PB1: *1.27
PB3: *1.55
PB4: *1.56
PB5: *1.57
PB8: *1.61
PB12: *1.33 D4.2 | length 76.6
  Top Layer w10: v1(2490,3640) 2544.05,3640 *1.33
PB13: *1.34
PB14: *1.35
PC1: *1.9
PC2: *1.10
PC3: *1.11
PC5: *1.25
PC6: *1.37
PC9: *1.40
PC10: *1.51
PC11: *1.52
PC12: *1.53
PC13: *1.2
PD2: *1.54
PGND: 1.2 C6.1 C10.1 C13.1 C14.1 C15.2 C18.1 C20.1 C23.2 C24.1 CV1.2 CV2.2 D5.1 D6.2 D7.2 D8.2 HIP1.6 LS2.7 LS2.11 LS2.12 LS2.13 P2.6 P4.2 P4.8 Q1.2 R8.1 R15.1 R18.1 R24.1 R30.1 Ri1.2 TPS1.6 TPS1.9 | length 119.9
  Top Layer w10: v1(2680,3689) 2749,3689 P2.6@2785,3725
PWM2A: *1.38 P1.4 | length 361
  Top Layer w10: *1.38 2595.63,3754.37 2614,3736 2614,3666 2755,3525 P1.4@2785,3525
PWM2B: *1.39 P1.5 | length 319
  Top Layer w10: *1.39 2600.94,3774.06 2630,3745 2630,3690 2695,3625 P1.5@2785,3625
PWMA: *1.58 LS2.2 | length 357.2
  Top Layer w10: *1.58 2305.47,4053.94 2318.27,4066.73 2366.73,4066.73 2385,4085 2385,4195 2400,4210 v1(2450,4210)
  Bottom Layer w10: LS2.2 2440,4220 v1(2450,4210)
PWMAIN: HIP1.4 LS2.3
PWMB: *1.59 LS2.5 | length 375.7
  Top Layer w10: v1(2285,4325) 2285,4320.53 2305,4300.53 2305,4087.44 2285.79,4068.23 *1.59
  Bottom Layer w10: v1(2285,4325) 2285,4269.06 LS2.5
PWMBIN: HIP1.3 LS2.6
RING: *1.8 R20.1 | length 551
  Top Layer w10: v1(2045,3740) 2045,3785 2073.43,3813.43 *1.8
  Bottom Layer w10: R20.1 1950,3500 2020,3570 2030,3570 2045,3585 v1(2045,3740)
RXD: *1.43 P3.5 | length 1354.2
  Top Layer w10: *1.43 2585.36,3852.8 2646,3792.15 2646,3734 2660,3720 2725,3720 2785,3780 2795.91,3780 2849,3833.09 2849,4686 P3.5
S_A: P4.6 R11.2 | length 293.8
  Top Layer w30: P4.6@1310,3903.54 1478.54,3735 R11.2
S_B: P4.7 R13.2 | length 266.6
  Top Layer w30: P4.7@1310,3750 1425,3635 R13.2
SDI: *1.23 P1.1 | length 759.2
  Top Layer w10: *1.23 2305.47,3553.23 2318.12,3540.58 2324.42,3540.58 2361,3504 2361,3394.25 2400.13,3355.13 2519.87,3355.13 2569.81,3305.19 2590.19,3305.19 2632,3263.37 2632,3220.63 2662.63,3190 2750,3190 P1.1@2785,3225
SPEED2_A: *1.22 P1.2 | length 968.4
  Top Layer w10: *1.22 2285.79,3549.21 2345,3490 2345,3387.63 2402.63,3330 2500,3330 2560,3270 2602.75,3270 2616,3256.75 2616,3214 2656,3174 2804,3174 2830,3200 2830,3280 P1.2@2785,3325
SPEED_A: *1.14 HCPL1.7 R12.2 | length 296.9
  Top Layer w10: v1(1830,3714) 1841,3725 HCPL1.7 1992,3698 2107.31,3698 *1.14
SPEED_B: *1.15 HCPL1.6 R14.2 | length 290.6
  Top Layer w10: v1(1830,3650) 1855,3675 HCPL1.6 2109.37,3675 *1.15
TXD: *1.42 P3.4 | length 1170.5
  Top Layer w10: v1(2505,3880) 2505,3850 2521.89,3833.11 *1.42 ; P3.4 2805,4640 2831,4614 2831,4525.09 2830,4524.09 2830,4455.91 2831,4454.91 2831,4425.09 2830,4424.09 2830,4355.91 2831,4354.91 2831,4325.09 2830,4324.09 2830,4000 v1(2805,3975)
  Bottom Layer w10: v1(2505,3880) 2505,3950 2530,3975 v1(2805,3975)
VI: MOS3.3 MOS4.3 R31.1 Ri1.1 | length 1102.4
  Top Layer w20: MOS4.3 1905,4380 1915,4370 1915,4055 1895,4035 MOS3.3
  Top Layer w30: MOS4.3 2100,4630 2220,4630 2285,4695 Ri1.1 2350,4695 R31.1
VIN: C13.2 CV1.1 CV2.1 MOS1.4 MOS2.4 P4.1 R27.1 TPS1.7 | length 1960.4
  Bottom Layer w10: C13.2@1503,4523 1545,4565 1691,4565 TPS1.7
  Bottom Layer w30: P4.1@1327.14,4649.94 1543.16,4649.94 1562.31,4669.09 1565.91,4669.09 ; 1565,4670 1665,4670 1710,4715 1985,4715 CV1.1
  Bottom Layer w40: MOS2.4@1515,4385 MOS2.4@1592.09,4385 ; 1530,4430 1535,4430 1569,4464 R27.1 ; MOS2.4@1610,4290 MOS2.4@1630,4290
  Bottom Layer w80: P4.1@1327.14,4649.94 MOS2.4@1592.09,4385 ; MOS2.4@1515,4385 MOS2.4@1610,4290 ; MOS1.4 MOS2.4@1630,4290
pads on no net: *2.6 *2.7 *2.8 P2.2 P2.4 P2.5 TJA1.5 TPS1.2 TPS1.3 TPS1.5 U1.4

## Keep-outs
Keep-Out Layer:
  lines w10: 1310,3155 2805,3155 ; 1330,3155 cw(c1312.5,3242.5) 1225,3225 1225,4760 cw(c1262.5,4762.5) 1265,4800 2835,4800 cw(c2822.5,4757.5) 2865,4745 ; 2790,3155 ccw(c2788.75,3231.25) 2865,3232.5 2865,4765